# EAGLE board TestFanControl (EAGLE 6.1)
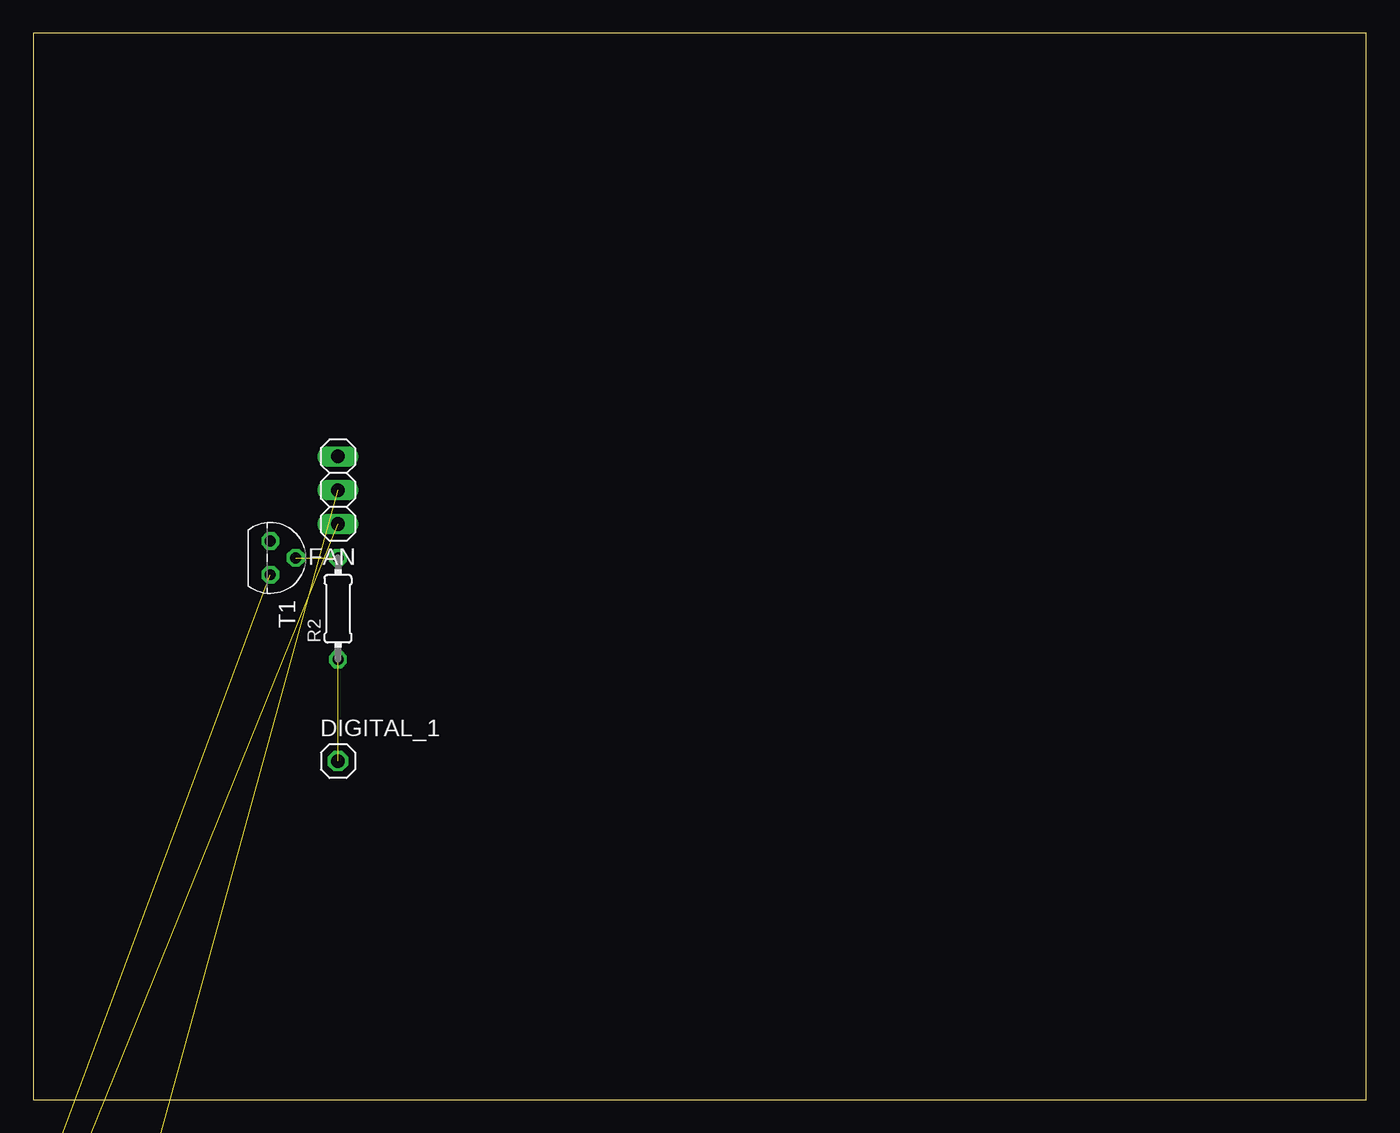
[diagram p0: board, top side]
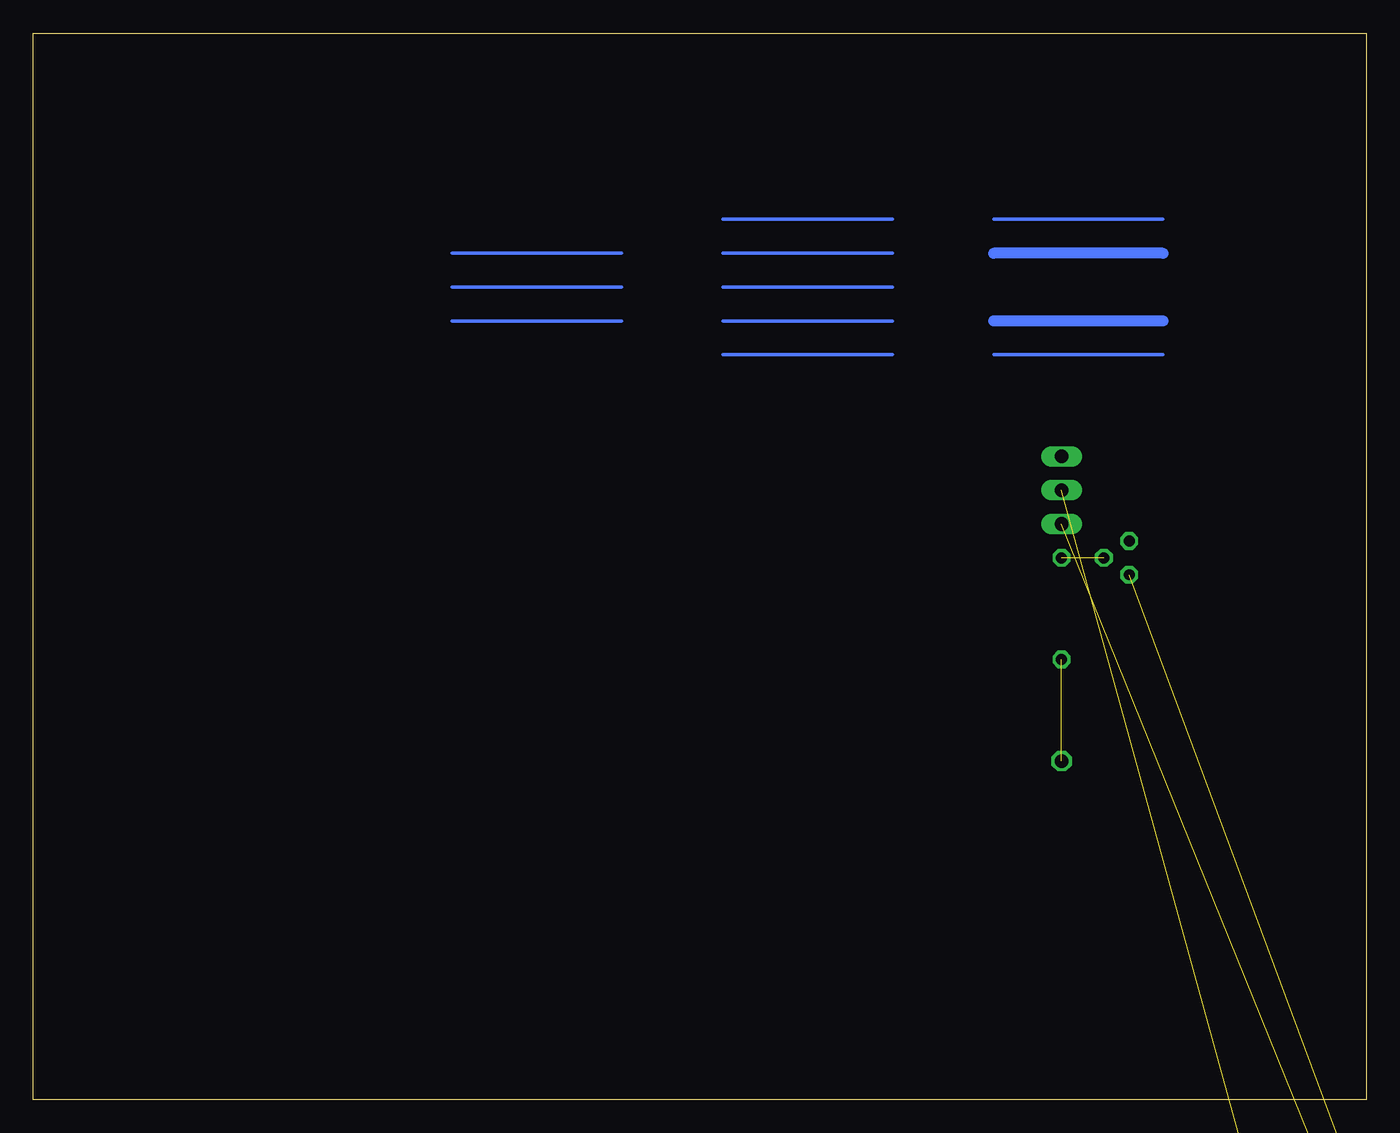
[diagram p1: board, bottom side, seen from below]

Size 100 x 80 mm. Coordinates in mm from the lower left corner, seen from the top.
Outline: 0,0 100,0 100,80 0,80 0,0
Copper layers (1*16): Top 0.035mm / dielectric 1.5mm / Bottom 0.035mm
Design rules: minimum track width 10mil, minimum drill 24mil, track to track 8mil, track to pad 8mil, pad to pad 8mil, via to via 8mil, smd to smd 8mil, copper to edge 40mil, drill to drill 8mil, minimum pad ring 10mil, minimum via ring 8mil, stop-mask expansion 4mil, vias tented up to drill 0mil, thermal gap 10mil

## Footprints (pad centres in the part's own frame; a part is rotated, then mirrored left to right if it is on the bottom)
C025-024X044 = drill 0.813 octagon: 1 -1.27,0; 2 1.27,0
1X01 = drill 1.016 octagon: 1 0,0
1X03 = drill 1.016 long: 1 -2.54,0; 2 0,0; 3 2.54,0
0204/7 = drill 0.813 octagon: 1 -3.81,0; 2 3.81,0
TO92 = drill 0.813 octagon: 1 1.27,0; 2 0,1.905; 3 -1.27,0

## Placement (x,y rotation side)
C1  [C025-024X044]  2.54,-10.16 0 top  (outside the outline)
DIGITAL_1  [1X01]  22.86,25.4 0 top
FAN  [1X03]  22.86,45.72 270 top
R1  [0204/7]  5.08,-5.08 0 top  (outside the outline)
R2  1k  [0204/7]  22.86,36.83 90 top
T1  BC548  [TO92]  17.78,40.64 270 top

## Library data of the parts
C1 R1 R2 = rcl
DIGITAL_1 FAN = pinhead
T1 = transistor

## Nets
+12V: T1.3
FAN7_PWM: DIGITAL_1.1 R2.1
FAN_PWR: C1.2 FAN.2 R1.2
GND: C1.1 FAN.3
N$8: R2.2 T1.2
N$9: R1.1 T1.1

## Tracks (layer width: path | path; a pad name or v marks a point on that pad's centre or on a via)
FAN7_PWM  (1 unrouted)
FAN_PWR  (2 unrouted)
GND  (1 unrouted)
N$2
  Bottom 0.254: 35.56,66.04 48.26,66.04
N$3
  Bottom 0.254: 15.24,66.04 27.94,66.04
N$4
  Bottom 0.813: 15.24,63.5 27.94,63.5
N$5
  Bottom 0.813: 15.24,58.42 27.94,58.42
N$6
  Bottom 0.254: 15.24,55.88 27.94,55.88
N$8  (1 unrouted)
N$9  (1 unrouted)
N$10
  Bottom 0.254: 35.56,63.5 48.26,63.5
N$12
  Bottom 0.254: 35.56,60.96 48.26,60.96
N$13
  Bottom 0.254: 35.56,58.42 48.26,58.42
N$14
  Bottom 0.254: 35.56,55.88 48.26,55.88
N$17
  Bottom 0.254: 55.88,63.5 68.58,63.5
N$18
  Bottom 0.254: 55.88,60.96 68.58,60.96
N$19
  Bottom 0.254: 55.88,58.42 68.58,58.42